# Altium PCB Main.PcbDoc
Units mm, origin at the board's own origin, x right, y up, seen from the top; angles counter-clockwise.
Board outline 152.4 x 101.6 mm, 2 copper layers (Top Layer, Bottom Layer); 84 components, 96 nets, 529 pads, 122 vias.
Unrouted connection lines stored in the file: 167.
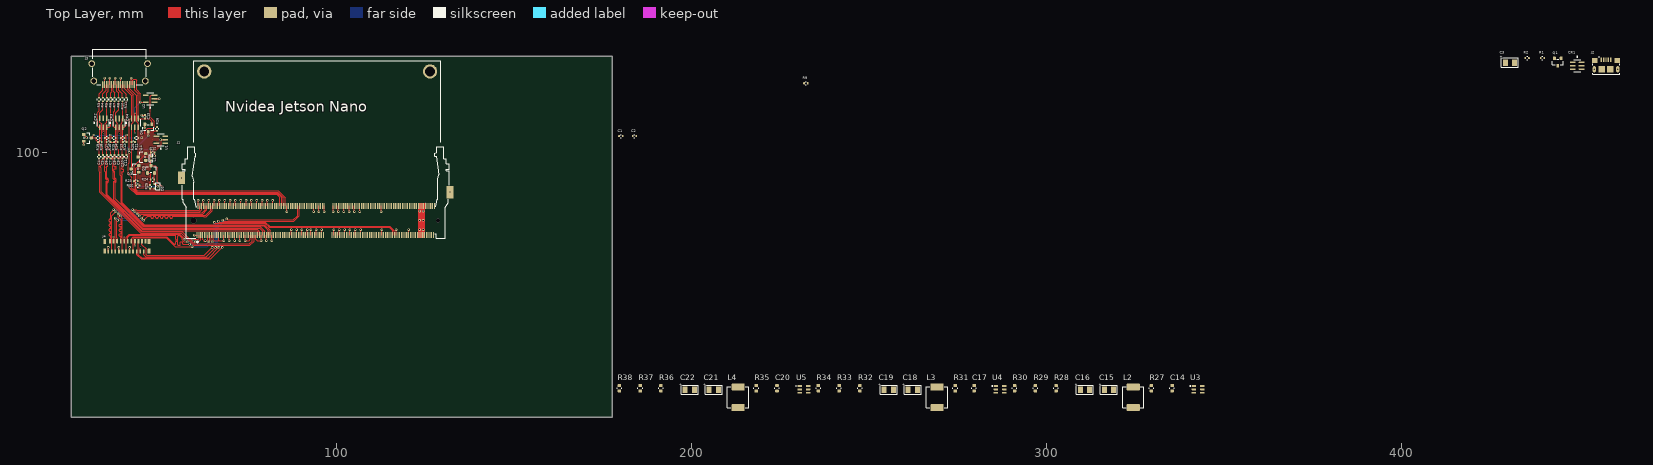
[diagram p0: Top Layer view]
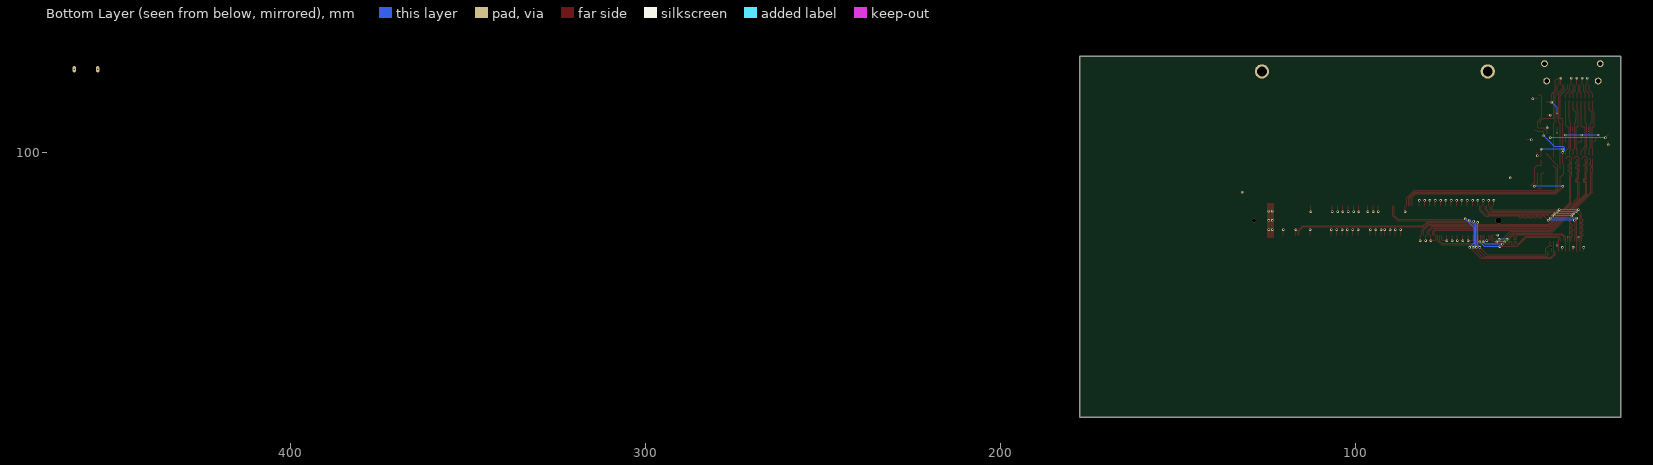
[diagram p1: Bottom Layer view, seen from below]

## Layer stack, top to bottom
Top Solder: solder mask 0.0102, Solder Resist, Dk 3.5
Top Layer: signal copper 0.0356
Dielectric 1: dielectric 0.32, FR-4, Dk 4.8
Bottom Layer: signal copper 0.0356
Bottom Solder: solder mask 0.0102, Solder Resist, Dk 3.5

## Board outline
25.4,25.4 177.8,25.4 177.8,127 25.4,127

## Design rules (kind name [scope] priority, off if disabled: settings)
Clearance [All] p1: gap=0.16 ignorepadtopadclearanceinfootprint=FALSE except(0: Arc-Hole Track-Hole SMDPad-Hole THPad-Hole Via-Hole Fill-Hole Poly-Hole Region-Hole Text-Hole)
DiffPairsRouting [All] p1: maxlimit=0.5 minlimit=0.16 mostfreqgap=0.2 toplayer_minwidth=0.16 toplayer_maxwidth=0.16 toplayer_prefwidth=0.16 bottomlayer_minwidth=0.16 bottomlayer_maxwidth=0.16 bottomlayer_prefwidth=0.16 maxuncoupledlength=12.7
MatchedLengths MatchedLengths_1 [InNetClass('HDMI')] p1: tolerance=1 checknetsindiffpair=FALSE checkdiffpairvsdiffpair=TRUE checkxsignals=TRUE checkothers=TRUE
MatchedLengths [All] p2: tolerance=0.5 checknetsindiffpair=TRUE checkdiffpairvsdiffpair=FALSE checkxsignals=FALSE checkothers=FALSE
PolygonConnect [All] p1: connectstyle=Relief reliefconductorwidth=0.254 reliefentries=4 polygonreliefangle="90 Angle" airgapwidth=0.254
RoutingVias [All] p1: holewidth=0.711 width=1.27 viastyle="Through Hole" minholewidth=0.711 minwidth=1.27 maxholewidth=0.711 maxwidth=1.27
SolderMaskExpansion [All] p1: expansion=0.102
Width [All] p1: maxlimit=5 minlimit=0.16 preferedwidth=0.16 minimp=50.000000 maximp=50.000000 favimp=50.000000
29 further rules are at their usual default settings.

## Classes and differential pairs
net class CSI: CAM1_C_N CAM1_C_P CAM1_D0_N CAM1_D0_P CAM1_D1_N CAM1_D1_P CAM1_D2_N CAM1_D2_P CAM1_D3_N CAM1_D3_P
component class PowerSupply: C14 C15 C16 C17 C18 C19 C20 C21 C22 L2 L3 L4 R27 R28 R29 R30 R31 R32 R33 R34 R35 R36 R37 R38 U3 U4 U5
net class HDMI: HDMI_CLK_N HDMI_CLK_P HDMI_D0_N HDMI_D0_P HDMI_D1_N HDMI_D1_P HDMI_D2_N HDMI_D2_P
differential pair class DIFF: CAM1_C CAM1_D0 CAM1_D1 CAM1_D2 CAM1_D3 HDMI_CLK HDMI_D0 HDMI_D1 HDMI_D2 USB0_D
component class NvideaJetsonPeripherals: C3 C4 C5 C6 C7 C8 C9 C10 C11 C12 C13 CR1 CR2 CR3 CR4 D1 J2 J3 J4 L1 Q1 Q2 Q3 Q4 Q5 Q6 R1 R2 R3 R4 R5 R6 R7 R8 R9 R10 R11 R12 R13 R14 R15 R16 R17 R18 R19 R20 R21 R22 R23 R24 R25 R26 U1 U2
component class NvideaJetsonNano: C1 C2
differential pair CAM1_D3: +CAM1_D3_P -CAM1_D3_N
differential pair CAM1_D2: +CAM1_D2_P -CAM1_D2_N
differential pair CAM1_D1: +CAM1_D1_P -CAM1_D1_N
differential pair CAM1_D0: +CAM1_D0_P -CAM1_D0_N
differential pair CAM1_C: +CAM1_C_P -CAM1_C_N
differential pair USB0_D: +USB0_D_P -USB0_D_N
differential pair HDMI_D2: +HDMI_D2_P -HDMI_D2_N
differential pair HDMI_D1: +HDMI_D1_P -HDMI_D1_N
differential pair HDMI_D0: +HDMI_D0_P -HDMI_D0_N
differential pair HDMI_CLK: +HDMI_CLK_P -HDMI_CLK_N

## Components (designator, comment, footprint, x,y, rotation, side; value= is the part's Value field where it differs from the comment)
C1 "CAP" C0402 180.213,104.521 r0 top value=0.1uF
C2 "CAP" C0402 184.023,104.521 r0 top value=0.1uF
C3 "CAP" CASE-A 430.53,125.222 r0 top value=4.7uF
C4 "CAP" C0402 33.275,98.675 r270 top value=0.1uF
C5 "CAP" C0402 34.375,98.675 r270 top value=0.1uF
C6 "CAP" C0402 35.475,98.675 r270 top value=0.1uF
C7 "CAP" C0402 36.575,98.675 r270 top value=0.1uF
C8 "CAP" C0402 37.675,98.675 r270 top value=0.1uF
C9 "CAP" C0402 38.775,98.675 r270 top value=0.1uF
C10 "CAP" C0402 39.875,98.675 r270 top value=0.1uF
C11 "CAP" C0402 40.975,98.675 r270 top value=0.1uF
C12 "CAP" C0402 48.4,99.925 r0 top value=12pF
C13 "CAP" C0402 46.2,109.95 r90 top value=12pF
C14 "CAP" C0603 335.416,33.527 r90 top value=1uF
C15 "CAP-P" CASE-A 317.615,33.077 r0 top value=22uF
C16 "CAP-P" CASE-A 310.865,33.077 r0 top value=22uF
C17 "CAP" C0603 279.664,33.527 r90 top value=1uF
C18 "CAP-P" CASE-A 262.363,33.077 r0 top value=22uF
C19 "CAP-P" CASE-A 255.637,33.077 r0 top value=22uF
C20 "CAP" C0603 224.161,33.527 r90 top value=1uF
C21 "CAP-P" CASE-A 206.36,33.077 r0 top value=22uF
C22 "CAP-P" CASE-A 199.61,33.077 r0 top value=22uF
CR1 "HDMIULC6-4SC6" SOT23-6L 449.453,124.333 r0 top
CR2 "HDMIULC6-4SC6" SOT23-6L 34.475,108.281 r90 top
CR3 "HDMIULC6-4SC6" SOT23-6L 38.975,108.225 r90 top
CR4 "HDMIULC6-4SC6" SOT23-6L 43.375,108.225 r90 top
D1 "BAS70W-05" SOT323-3 49.875,90.4 r270 top
J1 "2309411-2" TE_2309411 97.797,80.736 r180 top
J2 "10118193-0001LF" 10118193-0001LF 457.581,123.317 r0 top
J3 "10029449-111RLF" 10029449-111RLF 39.075,120.025 r180 top
J4 "5019512210" 5019512210 41.125,73.475 r0 top
L1 "IND" L0402 47.9,98.225 r90 top value=1nH
L2 "PA4332.103NLT" PA4332.XXXNLT 324.466,30.977 r0 top value=6.8uH
L3 "PA4332.103NLT" PA4332.XXXNLT 269.213,30.977 r0 top value=6.8uH
L4 "PA4332.103NLT" PA4332.XXXNLT 213.21,30.977 r0 top value=3.3uH
Q1 "DMG3414U-7" SOT23-3 443.992,125.349 r0 top
Q2 "DMG3414U-7" SOT23-3 30.025,104.025 r90 top
Q3 "DMG3414U-7" SOT23-3 43.45,95.3 r270 top
Q4 "DMG3414U-7" SOT23-3 45.375,98.625 r270 top
Q5 "DMG3414U-7" SOT23-3 47.9,95.175 r180 top
Q6 "DMG3414U-7" SOT23-3 47.15,106.8 r0 top
R1 "RES" R0402 439.674,126.492 r0 top value=0
R2 "RES" R0402 435.356,126.492 r0 top value=1M
R3 "RES" R0402 33.275,114.825 r270 top value=5
R4 "RES" R0402 34.375,114.825 r270 top value=5
R5 "RES" R0402 35.475,114.825 r270 top value=5
R6 "RES" R0402 36.575,114.825 r270 top value=5
R7 "RES" R0402 37.675,114.825 r270 top value=5
R8 "RES" R0402 38.775,114.825 r270 top value=5
R9 "RES" R0402 232.3,119.4 r0 top value=100k
R10 "RES" R0402 39.875,114.825 r270 top value=5
R11 "RES" R0402 40.975,114.825 r270 top value=5
R12 "RES" R0402 40.5,102.825 r0 top value=500
R13 "RES" R0402 39.925,104.025 r0 top value=500
R14 "RES" R0402 38.025,102.825 r180 top value=500
R15 "RES" R0402 37.475,104.025 r180 top value=500
R16 "RES" R0402 35.975,102.825 r0 top value=500
R17 "RES" R0402 35.425,104.025 r0 top value=500
R18 "RES" R0402 33.525,102.775 r180 top value=500
R19 "RES" R0402 32.975,104.025 r180 top value=500
R20 "RES" R0402 42.925,102.825 r180 top value=1.8k
R21 "RES" R0402 43.825,104.025 r0 top value=1.8k
R22 "RES" R0402 44.15,90.625 r180 top value=10k
R23 "RES" R0402 43.65,91.825 r180 top value=10k
R24 "RES" R0402 48.35,92.3 r0 top value=162k
R25 "RES" R0402 47.65,90.25 r270 top value=32.4k
R26 "RES" R0402 49.65,106.55 r270 top value=10k
R27 "RES" R0603 329.591,33.527 r90 top value=10k
R28 "RES" R0603 302.74,33.527 r90 top value=40.2k
R29 "RES" R0603 296.914,33.527 r90 top value=59k
R30 "RES" R0603 291.064,33.527 r90 top value=7.68k
R31 "RES" R0603 274.338,33.527 r90 top value=10k
R32 "RES" R0603 247.512,33.527 r90 top value=40.2k
R33 "RES" R0603 241.662,33.527 r90 top value=59k
R34 "RES" R0603 235.812,33.527 r90 top value=13k
R35 "RES" R0603 218.336,33.527 r90 top value=10k
R36 "RES" R0603 191.484,33.527 r90 top value=40.2k
R37 "RES" R0603 185.659,33.527 r90 top value=100k
R38 "RES" R0603 179.809,33.527 r90 top value=32.4k
U1 "MIC2005A-1YM5" SOT23-5 50.7,103.5 r180 top
U2 "MIC2005A-1YM5" SOT23-5 47.65,115.025 r180 top
U3 "AP65111AWU-7" SOT95P280X100-6N 342.742,33.202 r0 top
U4 "AP65111AWU-7" SOT95P280X100-6N 286.989,33.202 r0 top
U5 "AP65111AWU-7" SOT95P280X100-6N 231.736,33.202 r0 top

## Footprints (in the part's own frame and the unit in brackets; to place one, negate y for a bottom-side part, rotate by r counter-clockwise, add the part's x,y. Pads: shape width x height; smd on the part's side, far side on the other; paste and mask are expansions set on the pad)
10029449-111RLF [mm] "CONN RCPT 1.4 HDMI 19POS SMD R/A"
  round 1.9 hole 1.3: 0(-7.85,-4.9) 0(-7.25,0) 0(7.25,0) 0(7.85,-4.9)
  rrect50% 0.3x1.9 smd: 1(4.75,1) 2(4.25,1) 3(3.75,1) 4(3.25,1) 5(2.75,1) 6(2.25,1) 7(1.75,1) 8(1.25,1) 9(0.75,1) 10(0.25,1) 11(-0.25,1) 12(-0.75,1) 13(-1.25,1) 14(-1.75,1) 15(-2.25,1) 16(-2.75,1) 17(-3.25,1) 18(-3.75,1) 19(-4.25,1)
  silkscreen extent -7.5,-9 7.5,1, body extent -8.1,-8.45 8.1,1.65, height 6.28
10118193-0001LF [mm]
  rect 0.4x1.35 smd: 1(-1.3,2.675) 2(-0.65,2.675) 3(0,2.675) 4(0.65,2.675) 5(1.3,2.675)
  round 0.5 hole 0.5 unplated: None(-3.3,0) None(3.3,0)
  rect 1.6x1.4 smd: S(-3.2,2.45) S(3.2,2.45)
  rect 1.9x1.9 smd: S(-1.2,0) S(1.2,0)
  oval 0.9x1.8 hole 0.5: S5(-3.3,0) S6(3.3,0)
  silkscreen extent -3.8,-1.45 3.8,3.6
5019512210 [mm] "CONN FFC VERT 22POS 0.50MM SMD"
  rrect25% 0.8x1.4 smd: 0(-6.25,-1.35) 0(-6.25,1.35) 0(6.25,-1.35) 0(6.25,1.35)
  rrect25% 0.5x1.2 smd: 1(-5.25,-1.45) 2(-4.75,1.45) 3(-4.25,-1.45) 4(-3.75,1.45) 5(-3.25,-1.45) 6(-2.75,1.45) 7(-2.25,-1.45) 8(-1.75,1.45) 9(-1.25,-1.45) 10(-0.75,1.45) 11(-0.25,-1.45) 12(0.25,1.45) 13(0.75,-1.45) 14(1.25,1.45) 15(1.75,-1.45) 16(2.25,1.45) 17(2.75,-1.45) 18(3.25,1.45) 19(3.75,-1.45) 20(4.25,1.45) 21(4.75,-1.45) 22(5.25,1.45)
  body extent -6.9,-1.85 6.9,2.28, height 4.64
C0402 [mm]
  rrect50% 0.5x0.6 smd: 1(-0.5,0) 2(0.5,0)
  silkscreen extent -0.15,-0.43 0.15,0.43, body extent -0.5,-0.25 0.5,0.25, height 0.49
C0603 [mm]
  rrect50% 0.9x1 smd: 1(-0.75,0) 2(0.75,0)
  silkscreen extent -0.2,-0.65 0.2,0.65, body extent -0.8,-0.4 0.8,0.41, height 0.87
CASE-A [mm] "Vishay Case A"
  rect 1.4x1.8 smd: 1(-1.3,0) 2(1.3,0)
  silkscreen extent -2.4,-1.3 2.4,1.3, body extent -1.7,-0.84 1.7,0.84, height 1.7
L0402 [mm]
  rrect50% 0.5x0.6 smd: 1(-0.5,0) 2(0.5,0)
  silkscreen extent -1,-0.5 1,0.5, body extent -0.5,-0.3 0.5,0.3, height 0.5
PA4332.XXXNLT [mm] "Pulse - Fixed Inductor - 4.2x4.2"
  rrect25% 3.7x2 smd: 1(0,2.9) 2(0,-2.9)
  silkscreen extent -3,-3 3,3, body extent -3,-3 3,3, height 2
R0402 [mm]
  rrect50% 0.5x0.6 smd: 1(-0.5,0) 2(0.5,0)
  silkscreen extent -0.15,-0.45 0.15,0.45, body extent -0.5,-0.25 0.5,0.25, height 0.3
R0603 [mm]
  rrect50% 0.9x1 smd: 1(-0.75,0) 2(0.75,0)
  silkscreen extent -0.2,-0.65 0.2,0.65, body extent -0.8,-0.4 0.8,0.4, height 0.45
SOT23-3 [mm] "SOT23-3"
  rrect50% 0.8x1 smd: 1(0.95,1.05) 2(-0.95,1.05) 3(0,-1.05)
  silkscreen extent -1.5,-0.68 1.5,0.85, body extent -1.45,-1.4 1.45,1.4, height 1.3
SOT23-5 [mm]
  rrect50% 1.61x0.4 smd: 1(-1.244,0.95) 2(-1.244,0) 3(-1.244,-0.95) 4(1.244,-0.95) 5(1.244,0.95)
  silkscreen extent -1,-1.65 1,2.65, body extent -0.88,-1.52 0.88,1.52, height 1
SOT23-6L [mm]
  rrect50% 1.61x0.4 smd: 1(-1.244,0.95) 2(-1.244,0) 3(-1.244,-0.95) 4(1.244,-0.95) 5(1.244,0) 6(1.244,0.95)
  silkscreen extent -1,-1.65 1,2.65, body extent -0.88,-1.52 0.88,1.52, height 1
SOT95P280X100-6N [mm]
  rrect50% 1.24x0.55 smd: 1(-1.185,0.95) 2(-1.185,0) 3(-1.185,-0.95) 4(1.185,-0.95) 5(1.185,0) 6(1.185,0.95)
  silkscreen extent -2.35,0.86 -2.15,1.06, body extent -0.85,-1.5 0.85,1.5, height 1
SOT323-3 [mm]
  rrect25% 0.5x0.58 smd: 1(-0.65,-1.02) 2(0.65,-1.02) 3(0,1.02)
  silkscreen extent -1,-0.6 1,0.6, body extent -1,-0.6 1,0.6, height 1
TE_2309411 [mm]
  rect 0.3x1.75 smd: 1(36.875,4.1) 2(36.625,-4.1) 3(36.375,4.1) 4(36.125,-4.1) 5(35.875,4.1) 6(35.625,-4.1) 7(35.375,4.1) 8(35.125,-4.1) 9(34.875,4.1) 10(34.625,-4.1) 11(34.375,4.1) 12(34.125,-4.1) 13(33.875,4.1) 14(33.625,-4.1) 15(33.375,4.1) 16(33.125,-4.1) 17(32.875,4.1) 18(32.625,-4.1) 19(32.375,4.1) 20(32.125,-4.1) 21(31.875,4.1) 22(31.625,-4.1) 23(31.375,4.1) 24(31.125,-4.1) 25(30.875,4.1) 26(30.625,-4.1) 27(30.375,4.1) 28(30.125,-4.1) 29(29.875,4.1) 30(29.625,-4.1) 31(29.375,4.1) 32(29.125,-4.1) 33(28.875,4.1) 34(28.625,-4.1) 35(28.375,4.1) 36(28.125,-4.1) 37(27.875,4.1) 38(27.625,-4.1) 39(27.375,4.1) 40(27.125,-4.1) 41(26.875,4.1) 42(26.625,-4.1) 43(26.375,4.1) 44(26.125,-4.1) 45(25.875,4.1) 46(25.625,-4.1) 47(25.375,4.1) 48(25.125,-4.1) 49(24.875,4.1) 50(24.625,-4.1) 51(24.375,4.1) 52(24.125,-4.1) 53(23.875,4.1) 54(23.625,-4.1) 55(23.375,4.1) 56(23.125,-4.1) 57(22.875,4.1) 58(22.625,-4.1) 59(22.375,4.1) 60(22.125,-4.1) 61(21.875,4.1) 62(21.625,-4.1) 63(21.375,4.1) 64(21.125,-4.1) 65(20.875,4.1) 66(20.625,-4.1) 67(20.375,4.1) 68(20.125,-4.1) 69(19.875,4.1) 70(19.625,-4.1) 71(19.375,4.1) 72(19.125,-4.1) 73(18.875,4.1) 74(18.625,-4.1) 75(18.375,4.1) 76(18.125,-4.1) 77(17.875,4.1) 78(17.625,-4.1) 79(17.375,4.1) 80(17.125,-4.1) 81(16.875,4.1) 82(16.625,-4.1) 83(16.375,4.1) 84(16.125,-4.1) 85(15.875,4.1) 86(15.625,-4.1) 87(15.375,4.1) 88(15.125,-4.1) 89(14.875,4.1) 90(14.625,-4.1) 91(14.375,4.1) 92(14.125,-4.1) 93(13.875,4.1) 94(13.625,-4.1) 95(13.375,4.1) 96(13.125,-4.1) 97(12.875,4.1) 98(12.625,-4.1) 99(12.375,4.1) 100(12.125,-4.1) 101(11.875,4.1) 102(11.625,-4.1) 103(11.375,4.1) 104(11.125,-4.1) 105(10.875,4.1) 106(10.625,-4.1) 107(10.375,4.1) 108(10.125,-4.1) 109(9.875,4.1) 110(9.625,-4.1) 111(9.375,4.1) 112(9.125,-4.1) 113(8.875,4.1) 114(8.625,-4.1) 115(8.375,4.1) 116(8.125,-4.1) 117(7.875,4.1) 118(7.625,-4.1) 119(7.375,4.1) 120(7.125,-4.1) 121(6.875,4.1) 122(6.625,-4.1) 123(6.375,4.1) 124(6.125,-4.1) 125(5.875,4.1) 126(5.625,-4.1) 127(5.375,4.1) 128(5.125,-4.1) 129(4.875,4.1) 130(4.625,-4.1) 131(4.375,4.1) 132(4.125,-4.1) 133(3.875,4.1) 134(3.625,-4.1) 135(3.375,4.1) 136(3.125,-4.1) 137(2.875,4.1) 138(2.625,-4.1) 139(2.375,4.1) 140(2.125,-4.1) 141(1.875,4.1) 142(1.625,-4.1) 143(1.375,4.1) 144(1.125,-4.1) 145(-1.125,4.1) 146(-1.375,-4.1) 147(-1.625,4.1) 148(-1.875,-4.1) 149(-2.125,4.1) 150(-2.375,-4.1) 151(-2.625,4.1) 152(-2.875,-4.1) 153(-3.125,4.1) 154(-3.375,-4.1) 155(-3.625,4.1) 156(-3.875,-4.1) 157(-4.125,4.1) 158(-4.375,-4.1) 159(-4.625,4.1) 160(-4.875,-4.1) 161(-5.125,4.1) 162(-5.375,-4.1) 163(-5.625,4.1) 164(-5.875,-4.1) 165(-6.125,4.1) 166(-6.375,-4.1) 167(-6.625,4.1) 168(-6.875,-4.1) 169(-7.125,4.1) 170(-7.375,-4.1) 171(-7.625,4.1) 172(-7.875,-4.1) 173(-8.125,4.1) 174(-8.375,-4.1) 175(-8.625,4.1) 176(-8.875,-4.1) 177(-9.125,4.1) 178(-9.375,-4.1) 179(-9.625,4.1) 180(-9.875,-4.1) 181(-10.125,4.1) 182(-10.375,-4.1) 183(-10.625,4.1) 184(-10.875,-4.1) 185(-11.125,4.1) 186(-11.375,-4.1) 187(-11.625,4.1) 188(-11.875,-4.1) 189(-12.125,4.1) 190(-12.375,-4.1) 191(-12.625,4.1) 192(-12.875,-4.1) 193(-13.125,4.1) 194(-13.375,-4.1) 195(-13.625,4.1) 196(-13.875,-4.1) 197(-14.125,4.1) 198(-14.375,-4.1) 199(-14.625,4.1) 200(-14.875,-4.1) 201(-15.125,4.1) 202(-15.375,-4.1) 203(-15.625,4.1) 204(-15.875,-4.1) 205(-16.125,4.1) 206(-16.375,-4.1) 207(-16.625,4.1) 208(-16.875,-4.1) 209(-17.125,4.1) 210(-17.375,-4.1) 211(-17.625,4.1) 212(-17.875,-4.1) 213(-18.125,4.1) 214(-18.375,-4.1) 215(-18.625,4.1) 216(-18.875,-4.1) 217(-19.125,4.1) 218(-19.375,-4.1) 219(-19.625,4.1) 220(-19.875,-4.1) 221(-20.125,4.1) 222(-20.375,-4.1) 223(-20.625,4.1) 224(-20.875,-4.1) 225(-21.125,4.1) 226(-21.375,-4.1) 227(-21.625,4.1) 228(-21.875,-4.1) 229(-22.125,4.1) 230(-22.375,-4.1) 231(-22.625,4.1) 232(-22.875,-4.1) 233(-23.125,4.1) 234(-23.375,-4.1) 235(-23.625,4.1) 236(-23.875,-4.1) 237(-24.125,4.1) 238(-24.375,-4.1) 239(-24.625,4.1) 240(-24.875,-4.1) 241(-25.125,4.1) 242(-25.375,-4.1) 243(-25.625,4.1) 244(-25.875,-4.1) 245(-26.125,4.1) 246(-26.375,-4.1) 247(-26.625,4.1) 248(-26.875,-4.1) 249(-27.125,4.1) 250(-27.375,-4.1) 251(-27.625,4.1) 252(-27.875,-4.1) 253(-28.125,4.1) 254(-28.375,-4.1) 255(-28.625,4.1) 256(-28.875,-4.1) 257(-29.125,4.1) 258(-29.375,-4.1) 259(-29.625,4.1) 260(-29.875,-4.1)
  round 1.1 hole 1.1 unplated: None(-30.9,0)
  round 1.6 hole 1.6 unplated: None(37.9,0)
  rect 2x3.5 smd: S1(-34.25,-8) S2(41.25,-12)
  round 4 hole 2.75: S1(-28.7,-42) S2(34.9,-42)
  silkscreen extent -34.1,-45 41.08,6.2, body extent -35.01,-45 42.01,5.02, height 9.8

## Part data
C1 C2 C3 C4 C5 C6 C7 C8 C9 C10 C11 C12 C13 L1 R1 R2 R3 R4 R5 R6 R7 R8 R9 R10 R11 R12 R13 R14 R15 R16 R17 R18 R19 R20 R21 R22 R23 R24 R25 R26 R27 R28 R29 R30 R31 R32 R33 R34 R35 R36 R37 R38: "=Description"
C14 C15 C16 C17 C18 C19 C20 C21 C22: "=Description", Voltage=25V
D1: "SURFACE MOUNT SCHOTTKY BARRIER DIODE", Manufacturers Part No=BAS70W-05
J1: "DDR4 SODIMM 260P 8.0H STD", Package=None, Centerline_Pitch=".5 mm[.0197 in]", EU_RoHS_Compliance=Compliant, MF="TE Connectivity", MP=2309411-2, Number_of_Positions=260, Price=None, Product_Type=Socket, SnapEDA_Link=https://www.snapeda.com/parts/2309411-2/TE%20Connectivity/view-part/?ref=snap, TE_purchase_URL=https://www.te.com/usa-en/product-2309411-2.html?te_bu=Cor&te_type=disp&te_campaign=seda_glo_cor-seda-global-disp-prtnr-fy19-seda-model-bom-cta_sma-317_1&elqCampaignId=32493
J2: "Single Port 5 Contact Shielded SMT MICRO USB B-Type Receptacle", Package=None, Digi-Key_Part_Number=609-4616-1-ND, Digi-Key_Purchase_URL=https://www.digikey.com.au/product-detail/en/amphenol-icc-fci/10118193-0001LF/609-4616-1-ND/2785380?utm_source=snapeda&utm_medium=aggregator&utm_campaign=symbol, MF="Amphenol ICC", MP=10118193-0001LF, SnapEDA_Link=https://www.snapeda.com/parts/10118193-0001LF/Amphenol%20ICC/view-part/?ref=snap
J3: "CONN RCPT 1.4 HDMI 19POS R/A", Part_Number=10029449-111RLF
J4: library part HDR_1x22, "FFC 22 POS VERT", Part_Number=5019512210
L2 L3: library part IND, "=Description", Part_Number=PA4332.682NLT
L4: library part IND, "FIXED IND 10UH 2A 216 MOHM SMD", Part_Number=PA4332.332NLT
Q1 Q2 Q3 Q4: library part MOSFET_N_GSD, "=Description", Manufacturer Part No=DMG3414U-7
Q5 Q6: library part MOSFET_N_GSD, "N Channel MOSFET, SOT23", Part_Number=DMG3414U-7
U1 U2: "Power Switch/Driver 1:1 P-Channel 500mA SOT-23-5", Manufacturer Part No=MIC2005A-1YM5
U3 U4 U5: "Dcdc Conv Hv Buck Tsot26 t&r 3k", Package="TSOT-23-6 Diodes Inc.", Digi-Key_Part_Number=AP65111AWU-7DICT-ND, Digi-Key_Purchase_URL=https://www.digikey.com.au/product-detail/en/diodes-incorporated/AP65111AWU-7/AP65111AWU-7DICT-ND/7652826?utm_source=snapeda&utm_medium=aggregator&utm_campaign=symbol, MF="Diodes Inc.", MP=AP65111AWU-7, Part_Number=AP65111AWU-7, SnapEDA_Link=https://www.snapeda.com/parts/AP65111AWU-7/Diodes%20Inc./view-part/?ref=snap
CR1: Built_By=EMA_UL_Team, C="Copyright (C) 2015 Accelerated Designs. All rights reserved", Manufacturer_Part_Number=HDMIULC6-4SC6, Vendor=STMicroelectronics
CR2 CR3 CR4: Built_By=EMA_UL_Team, C="Copyright (C) 2015 Accelerated Designs. All rights reserved", Part_Number=HDMIULC6-4SC6, Vendor=STMicroelectronics

## Via types
v1: diameter 0.7, hole 0.3, Top Layer to Bottom Layer, tented both sides, 114 vias
v2: diameter 0.5, hole 0.3, Top Layer to Bottom Layer, tented both sides, 8 vias

## Nets (pads, with @x,y where several pads share a name; then routed paths per layer and width w, separated by ;. In a path a pad name is that pad's centre, name@x,y a point inside that pad or via, vN(x,y) a via of type N, cw(c..) or ccw(c..) an arc to the next point about the centre after c; other vN are vias at no path point)
CAM0_MCLK: J1.116 J4.18 | length 61.8
  Top Layer w0.16: J4.18 44.375,71.128 45.241,70.261 64.111,70.261 v1(67.05,73.2) ; v1(68.06,80.875) 68.06,80.85 68.325,80.585 88.16,80.585 89.672,82.097 J1.116
  Bottom Layer w0.16: v1(67.05,73.2) 66.42,73.83 66.42,79.235 v1(68.06,80.875)
CAM0_PWDN: J1.114 J4.17 | length 59.7
  Top Layer w0.16: J4.17 43.875,71.175 45.109,69.941 64.741,69.941 v1(68,73.2) ; v1(69.22,81.2) 69.22,81.185 69.5,80.905 88.027,80.905 89.172,82.05 J1.114
  Bottom Layer w0.16: v1(68,73.2) 66.74,74.46 66.74,78.72 v1(69.22,81.2)
CAM0_SCL: J1.213 J4.20 | length 83.6
  Top Layer w0.16: J4.20 45.375,73.95 46.525,72.8 46.525,71.15 46.774,70.901 62.851,70.901 v1(65.15,73.2) ; v1(65.74,80.225) 66.02,79.945 79.992,79.945 81.15,78.787 115.045,78.787 115.922,77.91 J1.213
  Bottom Layer w0.16: v1(65.15,73.2) 65.74,73.79 v1(65.74,80.225)
CAM0_SDA: J1.215 J4.21 | length 82
  Top Layer w0.16: J4.21 45.875,71.15 46.444,70.581 63.481,70.581 v1(66.1,73.2) ; v1(66.9,80.55) 67.185,80.265 80.124,80.265 81.282,79.107 115.178,79.107 116.422,77.863 J1.215
  Bottom Layer w0.16: v1(66.1,73.2) 66.1,79.75 v1(66.9,80.55)
CAM1_C_N: J1.10 J4.8 | length 36.4
  Top Layer w0.16: v1(38.65,82.625) 38.65,81.675 39.515,80.81 39.515,80.128 39.515,79.831 cw(c39.348,79.831) 39.348,79.664 39.177,79.664 ccw(c39.177,79.497) 39.01,79.497 39.01,79.163 ccw(c39.177,79.163) 39.177,78.996 39.348,78.996 cw(c39.348,78.829) 39.515,78.829 39.515,78.495 cw(c39.348,78.495) 39.348,78.328 39.177,78.328 ccw(c39.177,78.161) 39.01,78.161 39.01,77.827 ccw(c39.177,77.827) 39.177,77.66 39.348,77.66 cw(c39.348,77.493) 39.515,77.493 39.515,77.159 cw(c39.348,77.159) 39.348,76.992 39.177,76.992 ccw(c39.177,76.825) 39.01,76.825 39.01,76.491 ccw(c39.177,76.491) 39.177,76.324 39.348,76.324 cw(c39.348,76.157) 39.515,76.157 39.515,75.99 39.375,75.85 J4.8 ; v1(44,82.625) 44.295,82.92 62.336,82.92 63.15,83.734 63.15,84.814 J1.10
  Bottom Layer w0.16: v1(38.65,82.625) v1(44,82.625)
CAM1_C_P: J1.12 J4.9 | length 36.4
  Top Layer w0.16: v1(39.275,82.025) 39.875,81.425 J4.9 ; v1(44.625,82.025) 45.16,82.56 62.485,82.56 63.65,83.725 63.65,84.814 J1.12
  Bottom Layer w0.16: v1(39.275,82.025) v1(44.625,82.025)
CAM1_D0_N: J1.4 J4.2 | length 37.1
  Top Layer w0.16: J4.2 36.375,75.825 36.515,75.965 36.515,76.15 36.515,76.238 ccw(c36.348,76.238) 36.348,76.405 36.254,76.405 cw(c36.254,76.572) 36.087,76.572 36.087,76.906 cw(c36.254,76.906) 36.254,77.073 36.348,77.073 ccw(c36.348,77.24) 36.515,77.24 36.515,77.574 ccw(c36.348,77.574) 36.348,77.741 36.254,77.741 cw(c36.254,77.908) 36.087,77.908 36.087,78.242 cw(c36.254,78.242) 36.254,78.409 36.348,78.409 ccw(c36.348,78.576) 36.515,78.576 36.515,78.91 ccw(c36.348,78.91) 36.348,79.077 36.254,79.077 cw(c36.254,79.244) 36.087,79.244 36.087,79.578 cw(c36.254,79.578) 36.254,79.745 36.348,79.745 ccw(c36.348,79.912) 36.515,79.912 36.515,80.246 ccw(c36.348,80.246) 36.348,80.413 36.254,80.413 cw(c36.254,80.58) 36.087,80.58 36.087,80.914 cw(c36.254,80.914) 36.254,81.081 36.348,81.081 ccw(c36.348,81.248) 36.515,81.248 36.515,81.749 36.515,82.083 36.515,82.94 v1(37.4,83.825) ; v1(42.75,83.825) 43.725,83.825 43.95,83.6 61.425,83.6 61.65,83.825 61.65,84.814 J1.4
  Bottom Layer w0.16: v1(37.4,83.825) v1(42.75,83.825)
CAM1_D0_P: J1.6 J4.3 | length 37.1
  Top Layer w0.16: J4.3 36.875,82.075 v1(38.025,83.225) ; v1(43.375,83.225) 43.39,83.24 61.69,83.24 62.172,83.722 J1.6
  Bottom Layer w0.16: v1(38.025,83.225) v1(43.375,83.225)
CAM1_D1_N: J1.16 J4.5 | length 38.3
  Top Layer w0.16: J4.5 v1@37.875,81.425 ; v1(45.25,81.425) 46.065,82.24 63.34,82.24 64.672,83.572 J1.16
  Bottom Layer w0.16: v1(37.9,81.425) v1(45.25,81.425)
CAM1_D1_P: J1.18 J4.6 | length 38.2
  Top Layer w0.16: J4.6 38.375,75.775 38.235,75.915 38.235,80.535 v1(38.525,80.825) ; v1(45.875,80.825) 46.93,81.88 47.264,81.88 47.765,81.88 cw(c47.765,81.713) 47.932,81.713 47.932,81.597 ccw(c48.099,81.597) 48.099,81.43 48.433,81.43 ccw(c48.433,81.597) 48.6,81.597 48.6,81.713 cw(c48.767,81.713) 48.767,81.88 49.101,81.88 cw(c49.101,81.713) 49.268,81.713 49.268,81.597 ccw(c49.435,81.597) 49.435,81.43 49.769,81.43 ccw(c49.769,81.597) 49.936,81.597 49.936,81.713 cw(c50.103,81.713) 50.103,81.88 50.437,81.88 cw(c50.437,81.713) 50.604,81.713 50.604,81.597 ccw(c50.771,81.597) 50.771,81.43 51.105,81.43 ccw(c51.105,81.597) 51.272,81.597 51.272,81.713 cw(c51.439,81.713) 51.439,81.88 51.773,81.88 cw(c51.773,81.713) 51.94,81.713 51.94,81.597 ccw(c52.107,81.597) 52.107,81.43 52.441,81.43 ccw(c52.441,81.597) 52.608,81.597 52.608,81.713 cw(c52.775,81.713) 52.775,81.88 53.109,81.88 cw(c53.109,81.713) 53.276,81.713 53.276,81.597 ccw(c53.443,81.597) 53.443,81.43 53.777,81.43 ccw(c53.777,81.597) 53.944,81.597 53.944,81.713 cw(c54.111,81.713) 54.111,81.88 54.65,81.88 54.775,81.88 62.795,81.88 62.8,81.875 63.484,81.875 65.172,83.563 J1.18
  Bottom Layer w0.16: v1(38.525,80.825) v1(45.875,80.825)
CAM1_D2_N: J1.3 J4.11 | length 26.6
  Top Layer w0.16: J4.11 40.875,76 41.78,76.905 55.97,76.905 v1(57.45,75.425) ; v1(59.725,75.425) 61.2,75.425 61.425,75.65 61.425,76.633 J1.3
  Bottom Layer w0.16: v1(57.45,75.425) v1(59.725,75.425)
CAM1_D2_P: J1.5 J4.12 | length 26.6
  Top Layer w0.16: J4.12 41.375,75.991 41.929,76.545 53.175,76.545 54.652,76.545 cw(c54.652,76.378) 54.819,76.378 54.819,75.456 ccw(c54.986,75.456) 54.986,75.289 55.32,75.289 ccw(c55.32,75.456) 55.487,75.456 55.487,76.378 cw(c55.654,76.378) 55.654,76.545 55.821,76.545 56.658,75.708 56.658,75.267 57.175,74.75 v1(58.125,74.75) ; v1(60.4,74.75) 61.3,74.75 61.922,75.372 J1.5
  Bottom Layer w0.16: v1(58.125,74.75) v1(60.4,74.75)
CAM1_D3_N: J1.15 J4.14 | length 29.3
  Top Layer w0.16: J4.14 42.451,75.001 42.451,75.765 42.911,76.225 52.35,76.225 54.5,74.075 54.667,74.075 ccw(c54.667,74.242) 54.834,74.242 54.834,74.802 cw(c55.001,74.802) 55.001,74.969 55.335,74.969 cw(c55.335,74.802) 55.502,74.802 55.502,74.075 55.502,73.887 ccw(c55.669,73.887) 55.669,73.72 56.003,73.72 ccw(c56.003,73.887) 56.17,73.887 56.17,74.075 56.17,74.565 cw(c56.337,74.565) 56.337,74.732 56.671,74.732 cw(c56.671,74.565) 56.838,74.565 56.838,74.242 ccw(c57.005,74.242) 57.005,74.075 57.425,74.075 v1(58.8,74.075) ; v1(64.2,74.75) 64.422,74.75 J1.15
  Bottom Layer w0.16: v1(58.8,74.075) 63.525,74.075 v1(64.2,74.75)
CAM1_D3_P: J1.17 J4.15 | length 29.7
  Top Layer w0.16: J4.15 42.875,75.68 43.06,75.865 52.201,75.865 54.706,73.36 v1@59.475,73.36 ; v1@59.329,73.4 v1(59.475,73.4) ; J1.17 64.922,74.978 v1(65.15,74.75)
  Bottom Layer w0.16: v1(59.475,73.4) 63.8,73.4 v1(65.15,74.75)
CLK_N: C11.1 CR3.3 R11.2 R12.1 | length 16.3
  Top Layer w0.16: C11.1 40.975,100.325 39.925,101.375 CR3.3 40.431,106.981 40.975,107.525 R11.2
CLK_P: C10.1 CR3.4 R10.2 R13.1 | length 15.5
  Top Layer w0.16: C10.1 39.875,100.35 39.475,100.75 39.475,108.025 39.874,108.424 39.874,109.418 CR3.4 39.9,109.494 39.9,114.3 R10.2
CSI2_CLK_N: J1.28
CSI2_CLK_P: J1.30
CSI2_D0_N: J1.22
CSI2_D0_P: J1.24
CSI2_D1_N: J1.34
CSI2_D1_P: J1.36
CSI3_CLK_N: J1.27
CSI3_CLK_P: J1.29
CSI3_D0_N: J1.21
CSI3_D0_P: J1.23
CSI3_D1_N: J1.33
CSI3_D1_P: J1.35
D0_N: C9.1 CR3.6 R8.2 R14.1 | length 15.8
  Top Layer w0.16: R8.2 38.775,111.875 38.025,111.125 CR3.6 38.075,109.419 38.075,108.519 38.169,108.425 38.175,108.425 38.475,108.125 38.475,101 38.775,100.7 C9.1
D0_P: C8.1 CR3.1 R7.2 R15.1 | length 15.8
  Top Layer w0.16: C8.1 37.675,100.725 38.025,101.075 CR3.1 37.975,107.031 37.569,107.031 37.475,107.125 37.475,111.4 37.675,111.6 R7.2
D1_N: C7.1 CR2.3 R6.2 R16.1 | length 16.6
  Top Layer w0.16: C7.1 36.575,100.45 35.425,101.6 CR2.3 35.437,107.025 36.175,107.025 36.575,107.425 R6.2
D1_P: C6.1 CR2.4 R5.2 R17.1 | length 15.6
  Top Layer w0.16: C6.1 35.475,100.75 34.975,101.25 34.975,108.025 35.425,108.475 CR2.4 35.45,109.55 35.45,114.3 R5.2
D2_N: C5.1 CR2.6 R4.2 R18.1 | length 15.9
  Top Layer w0.16: C5.1 34.375,100.9 33.975,101.3 33.975,108.025 33.525,108.475 CR2.6 33.525,111.075 34.375,111.925 R4.2
D2_P: C4.1 CR2.1 R3.2 R19.1 | length 16
  Top Layer w0.16: C4.1 33.275,100.975 33.525,101.225 CR2.1 33.063,107.037 32.875,107.225 32.875,111.3 33.275,111.7 R3.2
GND: C1.2 C2.2 C3.2 C12.2 C13.2 C15.2 C16.2 C18.2 C19.2 C21.2 C22.2 CR1.2 CR2.2 CR3.2 CR4.2 J1.1 J1.2 J1.7 J1.8 J1.13 J1.14 J1.19 J1.20 J1.25 J1.26 J1.31 J1.32 J1.37 J1.38 J1.43 J1.44 J1.49 J1.50 J1.55 J1.56 J1.61 J1.62 J1.67 J1.68 J1.73 J1.74 J1.79 J1.80 J1.85 J1.86 J1.102 J1.107 J1.113 J1.119 J1.125 J1.129 J1.132 J1.135 J1.138 J1.141 J1.144 J1.146 J1.147 J1.152 J1.153 J1.158 J1.159 J1.164 J1.165 J1.170 J1.171 J1.176 J1.177 J1.200 J1.201 J1.217 J1.231 J1.241 J1.242 J1.243 J1.244 J1.245 J1.246 J1.247 J1.248 J1.249 J1.250 J1.S2 J2.5 J2.S J3.0 J3.2 J3.5 J3.8 J3.11 J3.17 J4.1 J4.4 J4.7 J4.10 J4.13 J4.16 J4.19 Q1.2 Q2.2 Q6.2 R2.1 R9.2 R30.2 R34.2 R38.2 U1.2 U2.2 U3.2 U4.2 U5.2 | length 123.2
  Top Layer w0.16: v2(34.475,105.531) CR2.2 ; J3.2 v1(34.825,120.825) ; J3.5 v1(36.325,120.825) ; J3.8 v1(37.825,120.825) ; v2(38.975,105.475) CR3.2 ; J3.11 v1(39.325,120.825) ; J3.17 v1(42.325,120.825) ; v2(43.375,105.475) CR4.2 ; v1(60.125,76.65) 60.908,76.65 J1.1 J1.1@60.924,76.635 ; J1.2 v1@61.172,86.394 ; J1.7 62.422,75.303 62.65,75.075 v1(63.175,75.075) 63.675,75.075 63.922,75.322 J1.13 ; J1.8 v1@62.672,86.394 ; J1.14 v1@64.172,86.394 ; J1.19 65.422,75.403 65.748,75.076 67.086,75.076 ; J1.20 v1@65.672,86.394 ; J1.25 66.922,75.24 67.086,75.076 ; J1.26 v1@67.172,86.394 ; J1.31@68.424,76.635 v1@68.424,75.076 ; v1@68.425,75.076 v1@68.424,75.076 ; J1.32 v1@68.672,86.394 ; v1@69.924,75.076 J1.37@69.924,76.635 ; J1.38 v1@70.172,86.394 ; v1@71.424,75.076 J1.43@71.424,76.635 ; J1.44 v1@71.672,86.394 ; v1@72.924,75.076 J1.49@72.924,76.635 ; J1.50 v1@73.172,86.394 ; J1.55@74.424,76.635 74.424,75.076 75.576,75.076 75.922,75.422 J1.61 ; J1.56 v1@74.672,86.394 ; J1.62 v1@76.172,86.394 ; J1.67 77.422,75.428 77.775,75.075 v1(78.922,75.075) J1.73 ; J1.68 v1@77.672,86.394 ; J1.74 v1@79.172,86.394 ; v1(80.422,75.075) J1.79 ; J1.80 v1@80.672,86.394 ; v1(81.922,75.075) J1.85 ; J1.86 v1@82.172,86.394 ; v1@86.172,83.278 J1.102 ; J1.107 v1(87.422,78.197) ; J1.113 v1(88.922,78.197) ; J1.119 v1(90.422,78.197) ; J1.125 v1(91.922,78.197) ; J1.129 v1(92.922,78.197) ; v1@93.672,83.278 J1.132 ; J1.135 v1(94.422,78.197) ; v1@95.172,83.278 J1.138 ; J1.141 v1(95.922,78.197) ; v1@96.672,83.278 J1.144 ; v1@99.172,83.278 J1.146 ; J1.147 v1(99.422,78.197) ; v1@100.672,83.278 J1.152 ; J1.153 v1(100.922,78.197) ; v1@102.172,83.278 J1.158 ; J1.159 v1(102.422,78.197) ; v1@103.672,83.278 J1.164 ; J1.165 v1(103.922,78.197) ; v1@105.172,83.278 J1.170 ; J1.171 v1(105.422,78.197) ; v1@106.672,83.278 J1.176 ; J1.177 v1(106.922,78.197) ; v1@112.672,83.278 J1.200 ; J1.201 v1(112.922,78.197) ; J1.217 v1(116.922,78.197) ; J1.231 v1(120.422,78.197) ; 67.086,75.076 v1@68.424,75.076
  Top Layer w0.25: v1(28.975,102.05) Q2.2 ; J4.1 v1(35.875,73.2) ; J4.4 v2(37.375,76.1) ; J4.7 v1(38.875,73.2) ; J4.10 v2(40.375,76.1) ; J4.13 v1(41.875,73.2) ; v2(43.375,73.75) J4.16 ; J4.19 v2(44.875,73.2) ; v1(45.25,110.45) C13.2 ; v1(46.2,106.8) Q6.2 ; U2.2 v1(50.225,115.025) ; v1(48.9,98.975) C12.2 ; v1(50.613,103.5) U1.2
  other v1: 68.425,75.075 69.925,75.075 71.425,75.075 72.925,75.075 74.425,75.075 123.55,78.197 124.575,78.197 123.55,80.786 124.575,80.786 86.173,83.277 93.673,83.277 95.173,83.277 96.673,83.277 99.173,83.277 100.673,83.277 102.173,83.277 103.673,83.277 105.173,83.277 106.673,83.277 112.673,83.277 123.55,83.375 124.575,83.375 61.171,86.395 62.671,86.395 64.171,86.395 65.671,86.395 67.171,86.395 68.671,86.395 70.171,86.395 71.671,86.395 73.171,86.395 74.671,86.395 76.171,86.395 77.671,86.395 79.171,86.395 80.671,86.395 82.171,86.395 56.546,92.737
HDMI_CEC: C12.1 CR4.6 J3.13 L1.2 | length 27.8
  Top Layer w0.16: J3.13 40.365,118.985 40.365,117.935 40.375,117.925 40.375,117.92 42.425,115.87 CR4.6 42.381,109.425 41.975,109.425 41.775,109.225 v1(41.775,100.85) ; L1.2 C12.1 v1(47.9,100.85)
  Bottom Layer w0.16: v1(41.775,100.85) v1(47.9,100.85)
HDMI_CEC_3V3: D1.1 J1.94 Q5.2 R24.2 | length 58.8
  Top Layer w0.16: v1(41.775,90.4) 41.775,90.044 43.704,88.115 83.36,88.115 84.172,87.303 J1.94 ; Q5.2 R24.2 48.853,92.298 48.853,91.053 D1.1 48.89,91.015 49.331,91.015 49.8,90.546 v1(49.8,90.4)
  Bottom Layer w0.16: v1(41.775,90.4) v1(49.8,90.4)
HDMI_CLK_N: C11.2 J1.81 | length 60.8
  Top Layer w0.16: C11.2 40.925,98.175 40.435,98.665 39.549,98.665 39.315,98.431 39.315,93.475 39.515,93.275 39.515,85.576 45.826,79.265 79.71,79.265 80.922,78.053 J1.81
HDMI_CLK_P: C10.2 J1.83 | length 60.4
  Top Layer w0.16: C10.2 39.875,97.45 39.875,97.149 ccw(c39.875,96.909) 39.635,96.909 39.635,96.721 ccw(c39.875,96.721) 39.875,96.481 39.936,96.481 cw(c39.936,96.147) 40.27,96.147 cw(c39.936,96.147) 39.936,95.813 39.875,95.813 ccw(c39.875,95.573) 39.635,95.573 39.635,95.385 ccw(c39.875,95.385) 39.875,95.145 39.936,95.145 cw(c39.936,94.811) 40.27,94.811 cw(c39.936,94.811) 39.936,94.477 39.875,94.477 ccw(c39.875,94.237) 39.635,94.237 39.635,94.049 ccw(c39.875,94.049) 39.875,93.809 39.875,93.642 39.875,93.475 39.875,85.725 45.975,79.625 79.859,79.625 81.422,78.062 J1.83
HDMI_D0_N: C9.2 J1.75 | length 61.1
  Top Layer w0.16: C9.2 38.725,98.175 38.235,98.665 37.349,98.665 37.125,98.441 37.125,94.55 37.315,94.36 37.315,93.26 37.315,92.564 ccw(c37.495,92.564) 37.495,92.384 cw(c37.495,92.096) 37.784,92.096 37.784,92.005 cw(c37.495,92.005) 37.495,91.716 ccw(c37.495,91.536) 37.315,91.536 37.315,86.801 45.531,78.585 78.54,78.585 79.422,77.703 J1.75
HDMI_D0_P: C8.2 J1.77 | length 60.7
  Top Layer w0.16: C8.2 37.675,97.425 37.675,97.419 ccw(c37.836,97.419) 37.836,97.258 cw(c37.836,96.924) 38.17,96.924 cw(c37.836,96.924) 37.836,96.59 37.675,96.59 ccw(c37.675,96.36) 37.445,96.36 37.445,96.152 ccw(c37.675,96.152) 37.675,95.922 37.836,95.922 cw(c37.836,95.588) 38.17,95.588 cw(c37.836,95.588) 37.836,95.254 37.675,95.254 ccw(c37.675,95.024) 37.445,95.024 37.445,94.816 ccw(c37.675,94.816) 37.675,94.586 37.675,94.252 37.675,93.417 37.675,92.719 cw(c37.495,92.096) 38.144,92.096 38.144,92.005 cw(c37.495,92.005) 37.675,91.382 37.675,86.95 45.68,78.945 78.689,78.945 79.922,77.712 J1.77
HDMI_D1_N: C7.2 J1.69 | length 61.1
  Top Layer w0.16: C7.2 36.525,98.175 36.035,98.665 35.149,98.665 34.925,98.441 34.925,94.55 35.115,94.36 35.115,93.619 35.115,92.536 ccw(c35.295,92.536) 35.295,92.356 cw(c35.295,92.067) 35.584,92.067 35.584,91.977 cw(c35.295,91.977) 35.295,91.688 ccw(c35.295,91.508) 35.115,91.508 35.115,88.039 45.249,77.905 77.645,77.905 77.922,77.628 J1.69 J1.69@77.875,76.683
HDMI_D1_P: C6.2 J1.71 | length 59.7
  Top Layer w0.16: C6.2 35.475,97.5 35.475,97.316 ccw(c35.475,97.086) 35.245,97.086 35.245,96.878 ccw(c35.475,96.878) 35.475,96.648 cw(c35.475,96.333) 35.79,96.333 35.79,96.295 cw(c35.475,96.295) 35.475,95.98 ccw(c35.475,95.75) 35.245,95.75 35.245,95.542 ccw(c35.475,95.542) 35.475,95.312 35.475,94.978 35.475,93.475 35.475,92.691 cw(c35.295,92.067) 35.944,92.067 35.944,91.977 cw(c35.295,91.977) 35.475,91.353 35.475,88.188 45.398,78.265 77.885,78.265 78.4,77.75 78.4,76.658 J1.71
HDMI_D2_N: C5.2 J1.63 | length 61
  Top Layer w0.16: C5.2 33.85,97.65 33.85,97.412 33.85,97.006 ccw(c33.911,97.006) 33.911,96.945 cw(c33.911,96.611) 34.245,96.611 cw(c33.911,96.611) 33.911,96.277 33.85,96.277 ccw(c33.85,96.022) 33.595,96.022 33.595,95.864 ccw(c33.85,95.864) 33.85,95.609 33.85,95.275 33.85,88.852 45.117,77.585 56.64,77.585 60.075,74.15 75.627,74.15 76.422,74.945 J1.63
HDMI_D2_P: C4.2 J1.65 | length 61.3
  Top Layer w0.16: C4.2 33.275,94.562 33.49,94.348 33.49,88.703 44.968,77.225 56.491,77.225 59.926,73.79 75.776,73.79 76.922,74.936 J1.65
HDMI_HPD: C13.1 CR4.4 J3.19 Q6.1 | length 14.9
  Top Layer w0.16: J3.19 43.325,117.4 44.325,116.4 CR4.4 44.344,109.45 C13.1 47.35,109.45 48.1,108.7 Q6.1
HDMI_HPD_1V8: J1.96 Q6.3 R26.2 | length 68.9
  Top Layer w0.16: v1(41.775,99.925) 41.775,97.025 41.55,96.8 41.55,93.85 42.5,92.9 42.5,89.771 43.836,88.435 83.493,88.435 84.672,87.256 J1.96 ; v1(47.125,104.55) 47.138,104.562 47.138,105.737 Q6.3 48.625,105.75 48.925,106.05 R26.2
  Bottom Layer w0.16: v1(41.775,99.925) 41.185,100.515 41.185,101.094 41.541,101.45 44.025,101.45 v1(47.125,104.55)
HDMI_SCL: J1.100 Q3.2 R22.2 | length 52.4
  Top Layer w0.16: Q3.2 44.465,96.25 44.154,95.939 44.154,95.904 43.65,95.4 R22.2 43.65,89.527 44.102,89.075 83.758,89.075 85.672,87.161 J1.100
HDMI_SCL_5V: CR4.1 J3.15 Q3.3 R20.2 | length 24.6
  Top Layer w0.16: J3.15 41.325,117.675 42.875,116.125 42.875,108.425 42.476,108.026 42.476,107.032 CR4.1 R20.2 Q3.3@42.425,95.3
HDMI_SDA: J1.98 Q4.2 R23.2 | length 57.2
  Top Layer w0.16: Q4.2@46.079,99.264 46.39,99.575 Q4.2 ; Q4.2@46.5,99.5 43.15,96.15 R23.2 43.15,89.574 43.969,88.755 83.625,88.755 85.172,87.208 J1.98
HDMI_SDA_5V: CR4.3 J3.16 Q4.3 R21.2 | length 21.4
  Top Layer w0.16: J3.16 41.825,117.925 43.875,115.875 43.875,108.625 44.325,108.175 CR4.3 R21.2 Q4.3
JT_SD_CLK: J1.229
JT_SD_CMD: J1.227
JT_SD_DATA0: J1.219
JT_SD_DATA1: J1.221
JT_SD_DATA2: J1.223
JT_SD_DATA3: J1.225
MOD_SLEEP: J1.178 R9.1 U1.3
NetC14_1: C14.1 U3.4
NetC14_2: C14.2 L2.1 U3.3
NetC17_1: C17.1 U4.4
NetC17_2: C17.2 L3.1 U4.3
NetC20_1: C20.1 U5.4
NetC20_2: C20.2 L4.1 U5.3
NetD1_2: D1.2 R25.2 | length 1.2
  Top Layer w0.16: R25.2 D1.2
NetD1_3: D1.3 L1.1 Q5.3 | length 9.3
  Top Layer w0.16: L1.1 Q5.3 49.075,96.225 49.65,95.65 49.65,91.645 D1.3
NetJ3_1: J3.1 R3.1 | length 4.1
  Top Layer w0.16: R3.1 33.275,116.375 34.325,117.425 J3.1
NetJ3_3: J3.3 R4.1 | length 4.1
  Top Layer w0.16: R4.1 34.375,116.425 35.325,117.375 J3.3
NetJ3_4: J3.4 R5.1 | length 3.8
  Top Layer w0.16: R5.1 35.475,116.725 35.825,117.075 J3.4
NetJ3_6: J3.6 R6.1 | length 3.8
  Top Layer w0.16: R6.1 36.575,116.775 36.825,117.025 ; 36.825,117.075 J3.6
NetJ3_7: J3.7 R7.1 | length 3.8
  Top Layer w0.16: J3.7 37.325,117.075 37.675,116.725 R7.1
NetJ3_9: J3.9 R8.1 | length 3.9
  Top Layer w0.16: J3.9 38.325,117.125 38.775,116.675 R8.1
NetJ3_10: J3.10 R10.1 | length 4.1
  Top Layer w0.16: J3.10 38.825,117.425 39.875,116.375 R10.1
NetJ3_12: J3.12 R11.1 | length 4.2
  Top Layer w0.16: J3.12 39.825,117.475 40.975,116.325 R11.1
NetQ1_1: Q1.1 R1.2 R2.2
NetQ2_3: Q2.3 R12.2 R13.2 R14.2 R15.2 R16.2 R17.2 R18.2 R19.2 | length 20.4
  Top Layer w0.16: Q2.3 Q2.3@31.11,104.025 ; v1@31.825,104.74 v1(31.825,104.825) ; R18.2 R18.2@33.025,102.825 ; R17.2 R17.2@35.925,104.075 ; R15.2 R15.2@36.975,104.075 ; R13.2 R13.2@40.425,104.099 ; R12.2@40.975,102.825 R12.2@41,102.85 ; v1@41,104.674 v1@41,104.8
  Top Layer w0.25: v1@31.825,104.74 31.11,104.025 R19.2 32.475,103.375 R18.2@33.025,102.825 ; R17.2@35.925,104.075 v1@36.372,104.522 ; v1(36.475,104.825) R16.2 R14.2 ; 36.578,104.472 R15.2@36.975,104.075 ; R13.2@40.425,104.099 41,104.674 R12.2@41,102.85
  Bottom Layer w0.25: v1(31.825,104.825) v1(36.475,104.825) v1(41.025,104.825)
NetR27_2: R27.2 U3.5
NetR28_2: R28.2 R29.2 R30.1
NetR29_1: R29.1 U3.6
NetR31_2: R31.2 U4.5
NetR32_2: R32.2 R33.2 R34.1
NetR33_1: R33.1 U4.6
NetR35_2: R35.2 U5.5
NetR36_2: R36.2 R37.2 R38.1
NetR37_1: R37.1 U5.6
SYS_SW: C15.1 C18.1 C21.1 R27.1 R31.1 R35.1 U3.1 U4.1 U5.1
USB0_D_N: CR1.1 J1.109 J2.2
USB0_D_P: CR1.3 J1.111 J2.3
USB0_VBUS: C3.1 CR1.5 J2.1 R1.1
USB0_VBUS_DET: J1.87 Q1.3
VBUS_HDMI: R20.1 R21.1
VBUS_HDMI_3V3: Q2.1 Q3.1 Q4.1 Q5.1 R22.1 R23.1 R24.1 R25.1 U1.5 U2.3 | length 35.3
  Top Layer w0.16: Q2.1@28.975,104.875 Q2.1 ; 46.175,105.2 46.175,105.897 46.978,106.7 48.5,106.7 48.8,107 48.8,108.675 47.65,109.825 47.65,115.7 47.925,115.975 U2.3 ; 47.4,94.05 47.45,94 ; 48.2,103.625 48.25,103.675
  Top Layer w0.25: Q2.1@28.975,104.875 v1(29.8,104.05) ; Q5.1@47,94.075 47.575,94.075 47.85,93.8 R24.1 47.85,91.6 47.65,91.4 R25.1
  Bottom Layer w0.25: v1(29.8,104.05) v1(45.3,104.05)
VBUS_HDMI_5V: CR4.5 J3.18 U2.5 | length 15.9
  Top Layer w0.25: J3.18 42.825,120.3 43.05,120.525 43.625,120.525 43.875,120.275 43.875,117.575 44.95,116.5 v1(44.95,114.075) U2.5 ; CR4.5 v2(43.375,110.975)
  Bottom Layer w0.25: v2(43.375,110.975) 43.375,112.5 v1(44.95,114.075)
VCC_1V8: C22.1 L4.2 R26.1 R36.1
VCC_3V3: C19.1 J4.22 L3.2 R32.1 U1.1
VCC_5V: C1.1 C2.1 C16.1 J1.251 J1.252 J1.253 J1.254 J1.255 J1.256 J1.257 J1.258 J1.259 J1.260 L2.2 R28.1 U2.1
pads on no net: CR1.4 CR1.6 CR2.5 CR3.5 J1.9 J1.11 J1.39 J1.40 J1.41 J1.42 J1.45 J1.46 J1.47 J1.48 J1.51 J1.52 J1.53 J1.54 J1.57 J1.58 J1.59 J1.60 J1.64 J1.66 J1.70 J1.72 J1.76 J1.78 J1.82 J1.84 J1.88 J1.89 J1.90 J1.91 J1.92 J1.93 J1.95 J1.97 J1.99 J1.101 J1.103 J1.104 J1.105 J1.106 J1.108 J1.110 J1.112 J1.115 J1.117 J1.118 J1.120 J1.121 J1.122 J1.123 J1.124 J1.126 J1.127 J1.128 J1.130 J1.131 J1.133 J1.134 J1.136 J1.137 J1.139 J1.140 J1.142 J1.143 J1.145 J1.148 J1.149 J1.150 J1.151 J1.154 J1.155 J1.156 J1.157 J1.160 J1.161 J1.162 J1.163 J1.166 J1.167 J1.168 J1.169 J1.172 J1.173 J1.174 J1.175 J1.179 J1.180 J1.181 J1.182 J1.183 J1.184 J1.185 J1.186 J1.187 J1.188 J1.189 J1.190 J1.191 J1.192 J1.193 J1.194 J1.195 J1.196 J1.197 J1.198 J1.199 J1.202 J1.203 J1.204 J1.205 J1.206 J1.207 J1.208 J1.209 J1.210 J1.211 J1.212 J1.214 J1.216 J1.218 J1.220 J1.222 J1.224 J1.226 J1.228 J1.230 J1.232 J1.233 J1.234 J1.235 J1.236 J1.237 J1.238 J1.239 J1.240 J1.None J1.S1 J2.4 J2.None J2.S5 J2.S6 J3.14 J4.0 U1.4 U2.4
copper on no net:
  other v1: 132.046,88.737

## Polygon pours and split planes (outlines as drawn)
VBUS_HDMI_3V3 on Top Layer "Top Layer-VBUS_HDMI_3V3" (solid, pour order 4): 43.65,89.638 47.538,89.638 47.65,89.75 47.65,94 47.525,94.125 46.95,94.125 47.9,95.075 47.9,99.925 48.9,99.925 50.95,101.975 50.95,103.163 48.363,105.75 44.325,105.75 44.325,97.212 43.65,96.537
no net on Top Layer "Top Layer-No Net" (solid, pour order 2): 47.65,89.75

## Keep-outs
Top Layer:
  region: 125.325,85.7

## Other copper
Top Layer:
  rectangle net GND: 123.025,75.775 125.075,85.7

## Silkscreen, mask and mechanical layers (free items; w line width, h text height)
Top Overlay:
  text "Nvidea Jetson Nano" at 68.875,111.35 h3

## Text inside footprints (layer, text, board x,y; h text height)
C3: Top Overlay "+" at 427.63,126.422 h0.7
C15: Top Overlay "+" at 314.715,34.277 h0.7
C16: Top Overlay "+" at 307.965,34.277 h0.7
C18: Top Overlay "+" at 259.463,34.277 h0.7
C19: Top Overlay "+" at 252.737,34.277 h0.7
C21: Top Overlay "+" at 203.46,34.277 h0.7
C22: Top Overlay "+" at 196.71,34.277 h0.7
CR1: Mechanical 1 "*" at 448.958,125.781 h0.79
CR2: Mechanical 1 "*" at 33.027,107.786 h0.79 r90
CR3: Mechanical 1 "*" at 37.527,107.73 h0.79 r90
CR4: Mechanical 1 "*" at 41.927,107.73 h0.79 r90
U1: Mechanical 1 "*" at 51.195,102.052 h0.79 r180
U2: Mechanical 1 "*" at 48.145,113.577 h0.79 r180